# Altium PCB 20K Control Board V1.1.PcbDoc (part 22 of 24)
Units mm, origin at the board's own origin, x right, y up, seen from the top; angles counter-clockwise.
Board outline 132 x 260 mm, 4 copper layers (Top Layer, GND, VCC, Bottom Layer); 1384 components, 779 nets, 4515 pads, 1774 vias.
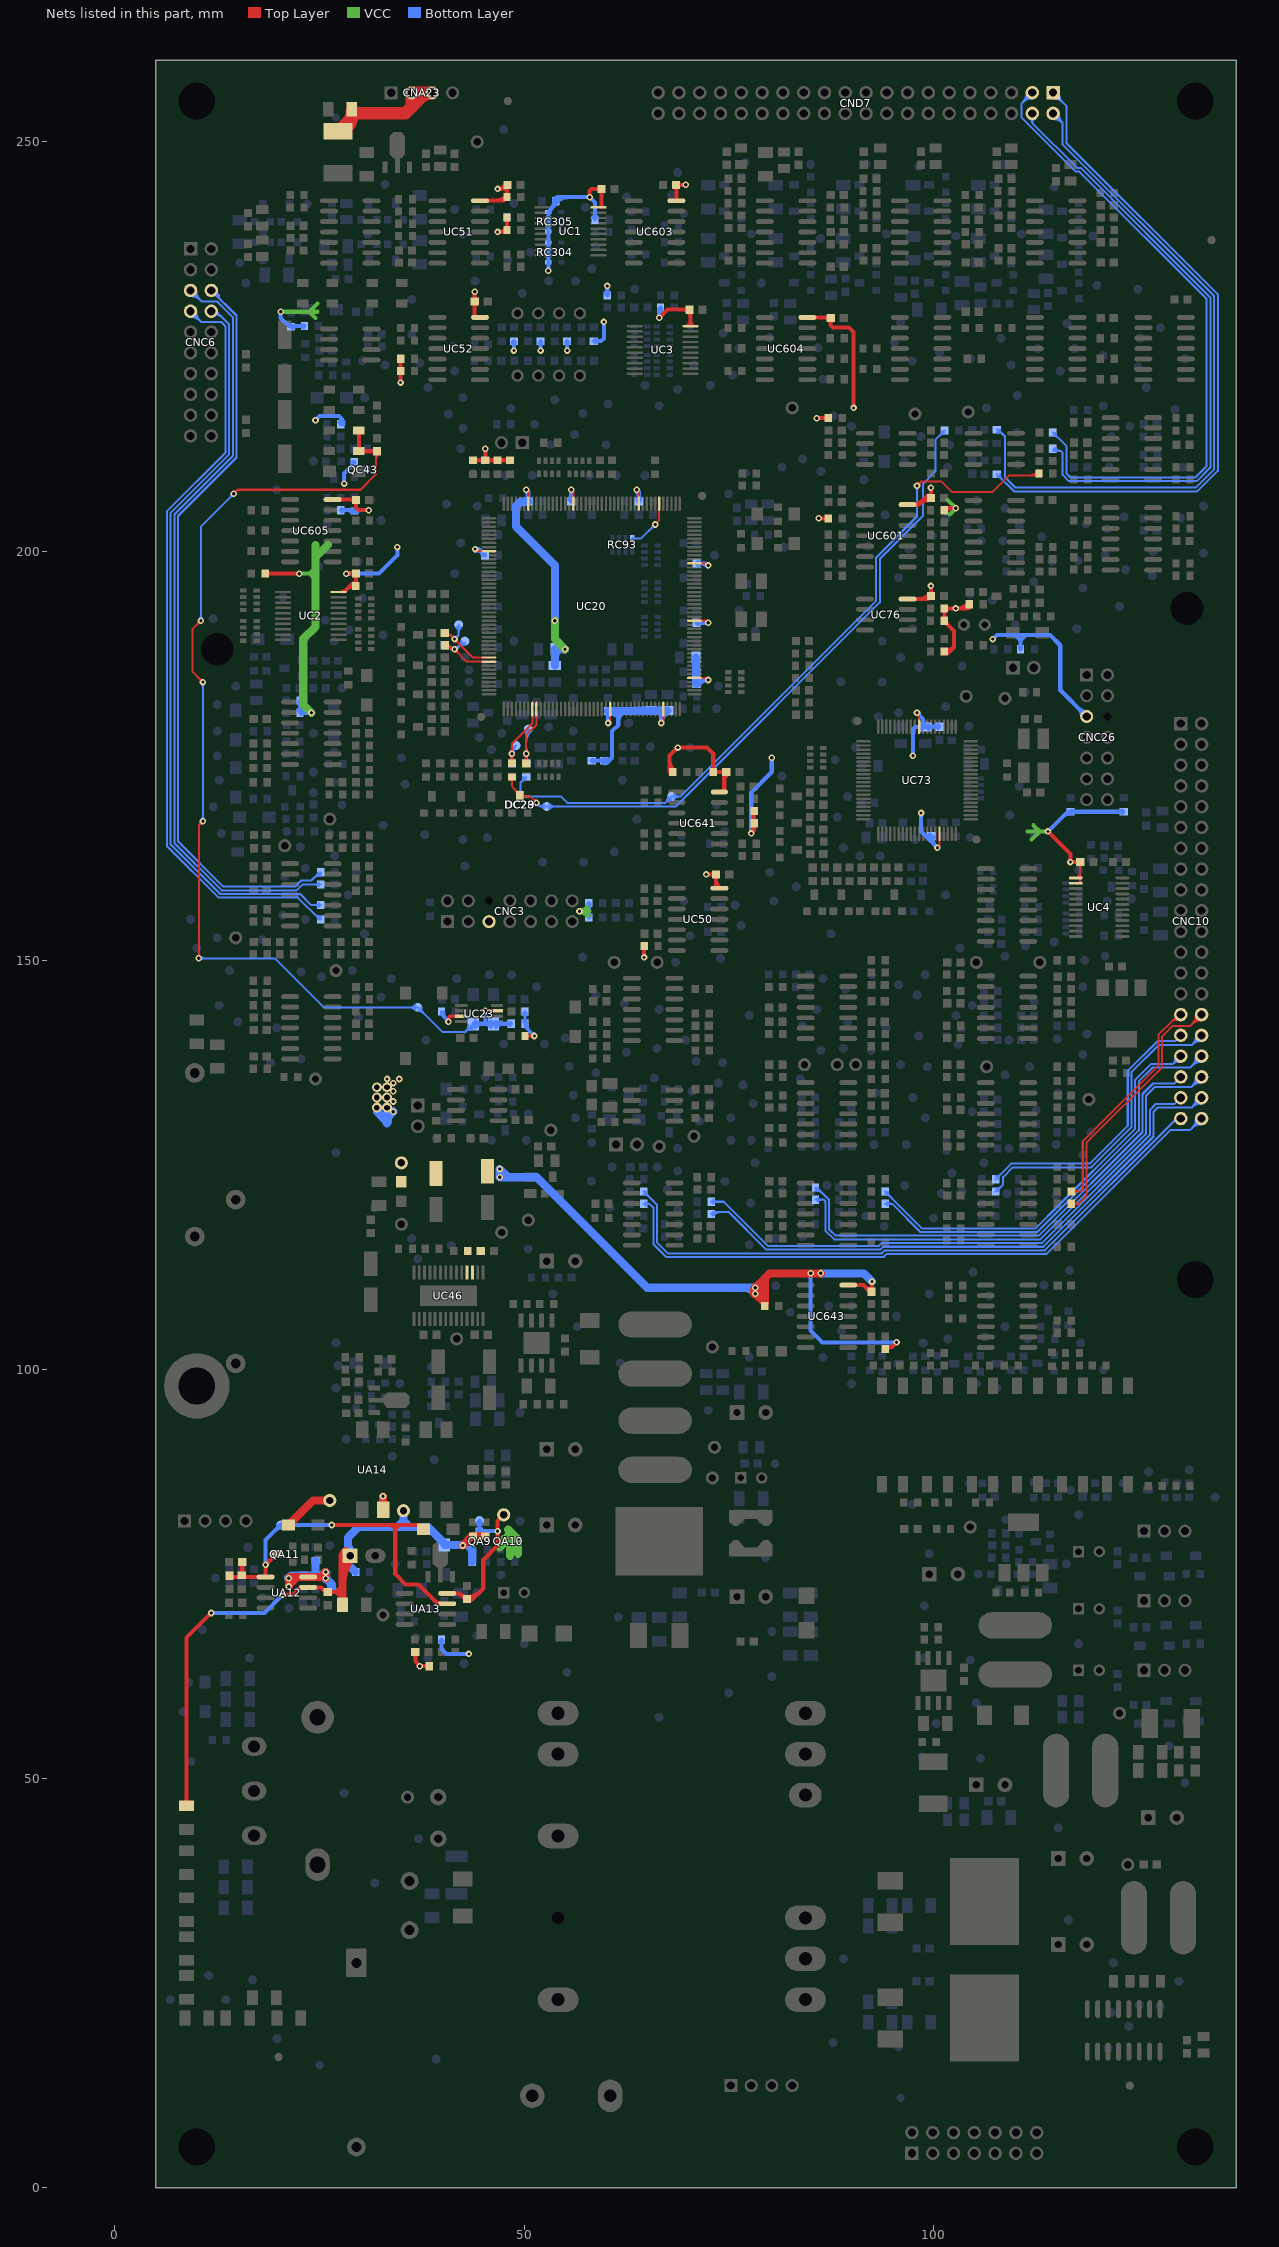
[diagram p24: the nets of this part, all layers, seen from the top]

## Via types
v1: diameter 0.8, hole 0.4, Top Layer to Bottom Layer, tented both sides, 1354 vias
v2: diameter 1.2, hole 0.7, Top Layer to Bottom Layer, 261 vias
v3: diameter 0.8, hole 0.4, Top Layer to Bottom Layer, 58 vias
v4: diameter 1.2, hole 0.7, Top Layer to Bottom Layer, tented top, 58 vias
v5: diameter 0.8, hole 0.4, Top Layer to Bottom Layer, tented top, 22 vias
v6: diameter 1.2, hole 0.7, Top Layer to Bottom Layer, tented both sides, 13 vias
v7: diameter 1.2, hole 0.7, Top Layer to Bottom Layer, tented bottom, 8 vias

## Nets (pads, with @x,y where several pads share a name; then routed paths per layer and width w, separated by ;. In a path a pad name is that pad's centre, name@x,y a point inside that pad or via, vN(x,y) a via of type N, cw(c..) or ccw(c..) an arc to the next point about the centre after c; other vN are vias at no path point) (continued)
V33D: CC30.2 CC42.1 CC46.1 CC108.2 CC109.2 CC123.1 CC124.1 CC125.1 CC126.1 CC127.1 CC128.1 CC129.1 CC130.1 CC131.1 CC141.2 CC179.1 CC180.1 CC181.1 CC182.1 CC186.1 CC187.1 CC221.1 CC293.1 CC296.1 CC297.2 CC308.2 CC405.1 CC420.1 CC424.2 CC425.1 CC442.1 CC445.2 CNC3.5 CNC26.5 EC4.1 EC5.1 LC2.1 LDM2.1 pad.ICT@33.25,130.25 QC43.2 RC110.1 RC212.2 RC214.2 RC215.2 RC216.2 RC226.1 RC232.1 RC268.1 RC269.2 RC270.2 RC271.1 RC272.1 RC276.2 RC277.2 RC278.2 RC279.2 RC284.1 RC287.2 RC289.1 RC290.2 RC292.2 RC296.2 RC298.2 RC304.5 RC304.6 RC304.7 RC304.8 RC305.5 RC305.6 RC305.7 RC305.8 RC316.2 RC317.2 RC337.2 RC340.2 RC382.1 RC449.1 RC450.1 RC455.1 RC490.2 RC493.2 RC494.1 RC500.1 RC520.2 RC521.2 RC522.2 RC523.2 RC524.2 RC525.2 RC532.1 RC622.1 RC635.2 RC636.2 RC647.1 RC648.1 RC654.1 RC658.1 RC660.1 RC698.2 RC699.1 RC700.2 TP59.1 UC1.20 UC2.20 UC3.20 UC4.1 UC4.2 UC20.9 UC20.71 UC20.84 UC20.93 UC20.107 UC20.121 UC20.143 UC20.159 UC20.170 UC23.3 UC46.17 UC46.18 UC50.14 UC51.14 UC52.14 UC73.36 UC73.70 UC76.8 UC601.14 UC603.14 UC604.14 UC605.14 UC641.14 UC643.14 | length 621.4
  Top Layer w0.25: v1(44,200.25) 44.25,200 UC20.9@45.7,200 ; v1(50.25,207.5) 50.5,207.25 UC20.170@50.5,205.8 ; v1(55.75,207.5) 56,207.25 UC20.159@56,205.8 ; v1(60.25,179) 60.5,179.25 UC20.71@60.5,180.7 ; v1(63.75,207.5) 64,207.25 UC20.143@64,205.8 ; v1(66.75,179) 67,179.25 UC20.84@67,180.7 ; UC3.20@69.8,227.5 70.3,228 ; 70.329,227.92 70.25,228 70.3,228 ; UC3.20@70.75,227.55 70.3,228 ; UC20.93@70.8,184.5 72.25,184.5 v1(72.5,184.25) ; UC20.107@70.8,191.5 72.25,191.5 v1(72.5,191.25) ; UC20.121@70.8,198.5 72.25,198.5 v1(72.5,198.25) ; v1(98,180.25) 98.25,180 UC73.70@98.25,178.55 ; v1(100.5,163.75) 100.75,164 UC73.36@100.75,165.45 ; UC4.2@117.4,159.425 117.925,159.425 117.925,160.5 ; UC4.1@117.5,160.075 117.925,160.5 ; CC221.1@117.685,161.735 cw(c117.105,161.155) 117.925,161.155 ; UC4.2@117.925,159.592 cw(c118.558,159.592) UC4.1@118.11,160.04 ; UC4.1@117.925,159.908 ccw(c118.558,159.908) UC4.2@118.11,159.46 ; UC4.1@117.925,159.954 ccw(c117.954,159.954) UC4.1@117.934,159.934 ; UC4.1@117.925,160.196 cw(c117.954,160.196) UC4.1@117.934,160.216 ; 117.925,160.558 ccw(c118.558,160.558) UC4.1@118.11,160.11 ; 117.925,161.034 cw(c118.916,161.034) CC221.1@118.215,161.735 ; CC221.1@117.95,162 117.925,161.975 117.925,160.5
  Top Layer w0.4: v1@40.609,142.641 ccw(c40.267,142.983) 40.75,142.983 ccw(c41.233,142.983) v1@40.891,142.641 ; v1(40.75,142.5) 40.75,143 40.925,143.175 ; v1@40.903,142.629 cw(c41.21,142.89) 40.925,143.175 ; UC23.3@42.323,143.175 40.925,143.175 ; RC284.1@49.85,140.75 v1(51.25,140.75) ; RC284.1@50.277,140.573 cw(c50.704,140.146) 50.704,140.75 cw(c50.704,141.354) RC284.1@50.277,140.927 ; v1@51.109,140.609 ccw(c50.767,140.267) 50.767,140.75 ccw(c50.767,141.233) v1@51.109,140.891
  Top Layer w0.5: RC296.2@18.35,197.25 v1(22.5,197.25) ; RC296.2@18.491,197.109 cw(c18.833,196.767) 18.833,197.25 cw(c18.833,197.733) RC296.2@18.491,197.391 ; UC605.14@26.6,206.31 29.39,206.31 CC180.1@29.45,206.25 29.45,205.3 29.75,205 v1(31,205) ; UC2.20@27.8,195.05 28.05,195.05 28.75,195.75 RC298.2@29.4,195.75 ; v1(28.25,197.25) CC181.1@29.45,197.25 RC298.2@29.45,195.95 ; 28.425,195.425 cw(c28.97,194.88) RC298.2@29.311,195.571 ; 28.702,206.31 cw(c28.702,205.502) 29.273,206.073 cw(c28.846,205.646) 29.45,205.646 cw(c30.054,205.646) CC180.1@29.627,206.073 ; 28.717,195.717 cw(c29.4,195.034) RC298.2@29.4,196 ; 28.918,195.918 cw(c29.296,195.54) RC298.2@29.533,196.019 ; RC298.2@29.259,195.609 ccw(c28.917,195.267) 28.917,195.75 ccw(c28.917,196.233) RC298.2@29.259,195.891 ; RC298.2@29.259,195.941 ccw(c28.796,196.404) 29.45,196.404 ; CC181.1@29.273,197.427 cw(c28.846,197.854) 28.846,197.25 cw(c28.846,196.646) 29.273,197.073 cw(c28.846,196.646) 29.45,196.646 cw(c30.054,196.646) CC181.1@29.627,197.073 ; RC520.2@34.759,221.809 cw(c34.417,221.467) 34.9,221.467 cw(c35.383,221.467) RC520.2@35.041,221.809 ; RC520.2@34.759,222.191 ccw(c34.417,222.533) 34.9,222.533 ccw(c35.383,222.533) RC520.2@35.041,222.191 ; RC521.2@34.759,223.309 cw(c34.417,222.967) 34.9,222.967 cw(c35.383,222.967) RC521.2@35.041,223.309 ; v1(34.9,220.6) RC520.2@34.9,222 RC521.2@34.9,223.5 ; RC216.2@43.75,211.1 RC215.2@45.25,211.1 ; UC52.14@43.765,228.595 ccw(c43.317,229.043) 43.95,229.043 ; CC42.1@43.773,230.323 cw(c43.346,229.896) 43.95,229.896 cw(c44.554,229.896) CC42.1@44.127,230.323 ; CC42.1@43.773,230.677 ccw(c43.346,231.104) 43.95,231.104 ccw(c44.554,231.104) CC42.1@44.127,230.677 ; RC216.2@43.941,210.959 cw(c44.283,210.617) 44.283,211.1 cw(c44.283,211.583) RC216.2@43.941,211.241 ; v1(43.95,231.7) CC42.1@43.95,230.5 43.95,228.55 UC52.14@43.96,228.56 ; UC51.14@44.6,242.81 44.615,242.825 47.475,242.825 RC525.2@47.9,243.25 CC30.2@47.9,244.7 ; RC215.2@45.059,210.959 ccw(c44.717,210.617) 44.717,211.1 ccw(c44.717,211.583) RC215.2@45.059,211.241 ; RC215.2@45.109,211.241 ccw(c44.767,211.583) 45.25,211.583 ccw(c45.733,211.583) RC215.2@45.391,211.241 ; v1(45.25,212.5) RC215.2@45.25,211.1 ; RC215.2@45.441,210.959 cw(c45.783,210.617) 45.783,211.1 cw(c45.783,211.583) RC215.2@45.441,211.241 ; 46.512,242.825 ccw(c46.512,244.588) RC525.2@47.759,243.341 ; RC214.2@46.559,210.959 ccw(c46.217,210.617) 46.217,211.1 ccw(c46.217,211.583) RC214.2@46.559,211.241 ; v1(46.75,239) RC522.2@47.9,239 ; v1@46.934,239 ccw(c46.934,240.166) RC522.2@47.759,239.341 ; RC214.2@46.941,210.959 cw(c47.283,210.617) 47.283,211.1 cw(c47.283,211.583) RC214.2@46.941,211.241 ; 47.55,244.25 ccw(c47.55,244.945) CC30.2@48.175,244.64 ; 47.7,244.25 v1(46.75,244.25) ccw(c46.75,245.335) CC30.2@47.725,244.86 ; CC30.2@47.7,244.5 CC30.2@47.9,244.7 ; RC522.2@47.759,239.441 ccw(c47.417,239.783) 47.9,239.783 ccw(c48.383,239.783) RC522.2@48.041,239.441 ; RC524.2@47.759,240.559 cw(c47.417,240.217) 47.9,240.217 cw(c48.383,240.217) RC524.2@48.041,240.559 ; RC525.2@47.759,243.441 ccw(c47.417,243.783) 47.9,243.783 ccw(c48.383,243.783) RC525.2@48.041,243.441 ; RC522.2@47.9,239.25 RC524.2@47.9,240.75 ; 47.9,244.026 cw(c48.674,244.026) CC30.2@48.127,244.573 ; CC30.2@47.95,244.75 CC30.2@47.9,244.7 ; RC212.2@48.059,210.959 ccw(c47.717,210.617) 47.717,211.1 ccw(c47.717,211.583) RC212.2@48.059,211.241 ; RC212.2@48.25,211.1 RC214.2@46.75,211.1 RC215.2@45.25,211.1 ; v1(58,243.25) 58,244 58.25,244.25 CC179.1@59.45,244.25 UC1.20@59.45,242.05 ; CC179.1@59.273,244.427 cw(c58.846,244.854) 58.846,244.25 cw(c58.846,243.646) 59.273,244.073 cw(c58.846,243.646) 59.45,243.646 cw(c60.054,243.646) CC179.1@59.627,244.073 ; RC532.1@64.509,151.559 cw(c64.167,151.217) 64.65,151.217 cw(c65.133,151.217) RC532.1@64.791,151.559 ; v1(64.65,150.35) RC532.1@64.65,151.5 ; v1(66.5,228.5) 67.5,229.5 CC186.1@70.2,229.5 ; RC272.1@67.75,173.291 ccw(c68.391,173.291) RC272.1@67.938,172.838 ; 67.75,174.499 ccw(c69.599,174.499) RC272.1@68.291,173.191 ; RC272.1@68.15,173 67.75,173.4 67.75,175 v1(68.75,176) 72.35,176 73.1,175.25 RC268.1@73.1,173 74.2,173 74.45,172.75 74.45,170.7 74.31,170.56 UC641.14@73.85,170.56 ; CC182.1@68.373,244.573 cw(c67.826,244.026) 68.6,244.026 ; CC182.1@68.55,244.75 v1(69.75,244.75) ; UC603.14@68.6,242.81 CC182.1@68.6,244.7 ; CC182.1@68.727,244.573 cw(c69.154,244.146) 69.154,244.75 cw(c69.154,245.354) CC182.1@68.727,244.927 ; CC186.1@70.023,229.677 cw(c69.596,230.104) 69.596,229.5 cw(c69.596,228.896) 70.023,229.323 cw(c69.355,228.655) 70.3,228.655 ; UC3.20@70.3,227.583 70.3,228 CC186.1@70.3,229.5 ; v1(72.25,160.5) CC46.1@73.45,160.5 UC50.14@73.45,158.8 ; RC268.1@72.959,173.191 ccw(c72.617,173.533) 73.1,173.533 ccw(c73.583,173.533) RC268.1@73.241,173.191 ; RC268.1@73.241,172.859 cw(c73.583,172.517) 73.583,173 cw(c73.583,173.483) RC268.1@73.241,173.141 ; CC46.1@73.273,160.677 cw(c72.846,161.104) 72.846,160.5 cw(c72.846,159.896) 73.273,160.323 cw(c72.846,159.896) 73.45,159.896 ; CC46.1@73.627,160.323 ccw(c74.054,159.896) 73.45,159.896 ; UC50.14@73.885,158.845 cw(c74.936,159.896) 73.45,159.896 ; 74.45,171.043 ccw(c75.083,171.043) UC641.14@74.635,170.595 ; 74.45,171.793 cw(c75.907,171.793) CC420.1@74.877,172.823 ; CC420.1@74.523,172.823 ccw(c74.096,172.396) 74.096,173 ccw(c74.096,173.604) CC420.1@74.523,173.177 ; v1@77.644,165.606 ccw(c76.543,166.707) RC654.1@78.1,166.707 ; v1(77.75,165.5) 78.1,165.85 RC658.1@78.1,168.25 ; RC654.1@77.959,166.559 cw(c77.617,166.217) 78.1,166.217 cw(c78.583,166.217) RC654.1@78.241,166.559 ; RC654.1@77.959,166.941 ccw(c77.617,167.283) 78.1,167.283 ccw(c78.583,167.283) RC654.1@78.241,166.941 ; RC658.1@77.959,168.059 cw(c77.617,167.717) 78.1,167.717 cw(c78.583,167.717) RC658.1@78.241,168.059 ; RC382.1@79.259,107.941 ccw(c78.917,108.283) 79.4,108.283 ccw(c79.883,108.283) RC382.1@79.541,107.941 ; RC382.1@79.4,107.75 79.4,109.25 ; UC604.14@84.6,228.56 CC187.1@87.39,228.56 ; v1(85.75,216.25) RC110.1@87.15,216.25 ; v1(86,204) RC232.1@87.15,204 ; 86.702,228.56 cw(c86.702,227.752) 87.273,228.323 cw(c86.846,227.896) 87.45,227.896 cw(c88.054,227.896) CC187.1@87.627,228.323 ; RC232.1@87.009,203.859 ccw(c86.667,203.517) 86.667,204 ccw(c86.667,204.483) RC232.1@87.009,204.141 ; RC110.1@87.009,216.109 ccw(c86.667,215.767) 86.667,216.25 ccw(c86.667,216.733) RC110.1@87.009,216.391 ; CC187.1@87.45,228.5 87.45,227.6 87.75,227.3 89.7,227.3 90.25,226.75 v1(90.25,217.5) ; UC643.14@90.69,110.31 UC643.14@89.6,110.31 ; 90.89,110.31 UC643.14@89.6,110.31 ; 91.682,110.068 ccw(c92.45,110.836) CC405.1@92.45,109.75 ; CC405.1@92.273,109.677 ccw(c91.726,110.224) 92.5,110.224 ; v1(92.5,110.75) 92.5,109.55 92.2,109.55 91.44,110.31 UC643.14@89.6,110.31 ; RC635.2@94.1,102.75 94.925,102.75 ; RC635.2@94.257,102.426 cw(c94.925,101.899) 94.925,102.75 ; v1(95.5,103.325) 94.925,102.75 ; UC76.8@96.85,194.155 96.855,194.15 99.35,194.15 CC442.1@99.7,194.5 v1(99.7,195.75) ; UC601.14@96.85,205.685 98.185,205.685 99,206.5 CC141.2@99.7,206.5 v1(99.7,207.75) ; UC601.14@97.65,205.735 ccw(c97.65,207.147) 98.649,206.149 ; 98.078,205.578 cw(c99.7,203.957) CC141.2@99.7,206.25 ; 98.251,194.15 ccw(c98.251,195.949) 99.523,194.677 ccw(c99.096,195.104) 99.7,195.104 ccw(c100.304,195.104) CC442.1@99.877,194.677 ; 98.65,206.15 cw(c99.202,205.598) CC141.2@99.579,206.281 ; 98.932,206.432 cw(c99.7,205.664) CC141.2@99.7,206.75 ; 99.12,206.62 cw(c99.536,206.204) CC141.2@99.821,206.719 ; CC141.2@99.523,206.323 ccw(c99.096,205.896) 99.096,206.5 ccw(c99.096,207.104) 99.523,206.677 ccw(c99.096,207.104) 99.7,207.104 ccw(c100.304,207.104) CC141.2@99.877,206.677 ; RC699.1@101.209,191.691 ccw(c100.867,192.033) 101.35,192.033 ccw(c101.833,192.033) RC699.1@101.491,191.691 ; RC698.2@101.209,192.809 cw(c100.867,192.467) 101.35,192.467 cw(c101.833,192.467) RC698.2@101.491,192.809 ; RC700.2@101.257,187.515 ccw(c101.461,188.138) 101.924,187.674 ; RC700.2@101.35,187.75 102,187.75 102.5,188.25 ; RC226.1@101.35,205 101.6,205.25 v1(102.75,205.25) ; RC700.2@101.412,187.99 ccw(c101.745,189.005) 102.5,188.25 ; RC700.2@101.491,187.609 cw(c101.833,187.267) 101.833,187.75 cw(c101.833,188.233) RC700.2@101.491,187.891 ; RC698.2@101.491,192.859 cw(c101.833,192.517) 101.833,193 cw(c101.833,193.483) RC698.2@101.491,193.141 ; RC226.1@101.491,204.909 cw(c102.316,204.084) 102.316,205.25 ; RC699.1@101.55,191.45 ccw(c102.154,191.45) RC699.1@101.727,191.023 ; v1@102.831,193 ccw(c102.831,195.019) RC455.1@104.259,193.591 ; RC455.1@103.973,193.073 cw(c104.4,192.646) RC455.1@104.4,193.25 ; 104.038,193 ccw(c104.038,193.812) RC455.1@104.612,193.238 ; RC455.1@104.4,193.5 103.9,193 RC698.2@101.35,193 RC699.1@101.35,191.5 101.35,191.4 102.5,190.25 102.5,188.25 ; v1(114,165.75) 116.75,163 v1(116.75,162) CC221.1@117.9,162 ; CC221.1@117.773,161.823 ccw(c117.346,161.396) 117.346,162 ccw(c117.346,162.604) CC221.1@117.773,162.177
  Top Layer w1: v1@78.15,109.25 cw(c79.719,109.25) 78.61,110.36 ; v1@78.15,110 ccw(c79.719,110) 78.61,108.89 ; v1@78.164,109.302 cw(c79.4,108.558) 79.4,110 v1(78.25,110) ; v1@78.164,109.948 ccw(c79.4,110.692) 79.4,109.25 ; v1@78.166,109.195 cw(c78.704,109.546) v1(78.25,110) ; v1(86.25,111.75) 80,111.75 79.4,111.15 ; v1(78.25,109.25) 79.4,108.1 79.4,109.25 ; v1(78.25,109.25) 79.4,109.25 ; v1(78.25,109.25) v1(78.25,110) ; v1(78.25,110) 79.4,111.15 ; 79.4,109.25 79.4,111.15
  VCC w0.5: v1(20.25,229.25) 23.75,229.25 ; v1(22.5,197.25) 23.75,197.25 ; 24.25,197.25 23.75,197.25 ; 24.5,196.5 23.75,197.25 ; 24.5,198 23.75,197.25 ; 24.5,228.5 23.75,229.25 ; 24.75,229.25 23.75,229.25 ; 24.75,230.25 23.75,229.25 ; v1@56.759,155.85 cw(c56.759,154.302) 57.853,155.397 ; v1@56.773,156.149 ccw(c56.89,157.36) 57.75,156.5 57.25,156 ; v1@56.825,155.865 cw(c57.083,155.342) 57.495,155.755 ; 57.75,155.5 57.25,156 ; 58,156 v1(56.759,156) 57.25,156 ; 101.5,205.25 v1(102.75,205.25) ; 101.75,206.25 v1(102.75,205.25) ; 102,204.5 v1(102.75,205.25) ; 111.5,165.75 113,165.75 ; 112,164.75 113,165.75 ; 112.25,166.5 113,165.75 ; v1(114,165.75) 113,165.75
  VCC w1: v1(24,180.25) 23,181.25 23,189.25 24.5,190.75 24.5,199.25 ; 24.5,200.75 24.5,199.25 ; 26,200.75 24.5,199.25 ; v1(53.75,191.5) 53.75,189.25 v1(55,188)
  Bottom Layer w0.4: RC270.2@39.9,143.75 39.9,143.375 v1@40.75,142.525 ; RC270.2@40.15,143.7 ccw(c41.538,143.7) v1@40.557,142.718 ; 40.391,142.884 cw(c40.007,142.5) v1@40.55,142.5 ; 40.451,142.824 ccw(c40.75,143.122) v1@40.75,142.7 ; RC271.1@49.923,142.477 ccw(c49.496,142.904) 50.1,142.904 ccw(c50.704,142.904) RC271.1@50.277,142.477 ; RC269.2@49.923,143.523 cw(c49.496,143.096) 50.1,143.096 cw(c50.704,143.096) RC269.2@50.277,143.523 ; RC269.2@50.1,143.75 50.1,141.9 v1(51.25,140.75) ; RC271.1@50.35,142.2 ccw(c51.678,142.2) 50.739,141.261 ; v1@51.05,140.75 ccw(c50.567,140.75) 50.909,141.091 ccw(c51.25,141.433) v1@51.25,140.95
  Bottom Layer w0.5: v1(20.25,229.25) 20.25,228.5 21.25,227.5 RC340.2@23.15,227.5 ; 20.938,227.812 ccw(c21.45,228.324) RC337.2@21.45,227.6 ; RC337.2@21.691,227.259 cw(c22.274,226.676) 22.274,227.5 ; RC449.1@22.459,180.441 ccw(c22.117,180.783) 22.6,180.783 ccw(c23.083,180.783) RC449.1@22.741,180.441 ; RC450.1@22.459,181.559 cw(c22.117,181.217) 22.6,181.217 cw(c23.083,181.217) RC450.1@22.741,181.559 ; RC450.1@22.6,181.75 RC449.1@22.6,180.25 v1(24,180.25) ; RC449.1@22.741,180.109 cw(c23.083,179.767) 23.083,180.25 cw(c23.083,180.733) RC449.1@22.741,180.391 ; RC340.2@23.009,227.359 ccw(c22.667,227.017) 22.667,227.5 ccw(c22.667,227.983) RC340.2@23.009,227.641 ; v1(24.5,216) 25,216.5 27.35,216.5 27.6,216.25 RC490.2@27.6,215.5 ; RC490.2@27.459,215.691 ccw(c27.117,216.033) 27.6,216.033 ccw(c28.083,216.033) RC490.2@27.741,215.691 ; RC493.2@27.6,205 RC494.1@29.15,205 ; 27.683,216.167 cw(c27.145,215.628) RC490.2@27.896,215.499 ; RC493.2@27.741,204.859 cw(c28.083,204.517) 28.083,205 cw(c28.083,205.483) RC493.2@27.741,205.141 ; v1(28,208.25) 28,209.5 29.25,210.75 QC43.2@29.25,210.905 ; v1(28.25,197.25) 32.25,197.25 34.5,199.5 v1(34.5,200.5) ; 28.476,205 cw(c28.476,204.176) RC494.1@29.059,204.759 ; 28.787,210.287 ccw(c28.168,210.905) QC43.2@29.043,210.905 ; RC494.1@29.25,204.9 29.35,205 v1(31,205) ; RC494.1@29.441,204.759 cw(c30.024,204.176) 30.024,205 ; v1@44,200.1 cw(c44,198.651) CC124.1@45.024,199.676 ; v1(44,200.25) 44.45,200.25 CC124.1@45.2,199.5 ; v1@44.07,200.117 cw(c44.31,199.66) 44.675,200.025 ; CC124.1@44.95,199.5 ccw(c44.346,199.5) 44.773,199.927 ccw(c45.2,200.354) CC124.1@45.2,199.75 ; v1(46.75,239) 47.5,239 47.9,239.4 RC523.2@47.9,240.75 ; RC523.2@47.759,240.559 cw(c47.417,240.217) 47.9,240.217 cw(c48.383,240.217) RC523.2@48.041,240.559 ; RC279.2@48.609,225.509 cw(c48.267,225.167) 48.75,225.167 cw(c49.233,225.167) RC279.2@48.891,225.509 ; v1(48.75,224.5) RC279.2@48.75,225.65 ; v1@50.144,207.394 cw(c49.284,206.534) CC131.1@50.5,206.534 ; v1(50.25,207.5) 50.5,207.25 CC131.1@50.5,206.05 ; CC131.1@50.323,206.227 ccw(c49.896,206.654) 50.5,206.654 ccw(c51.104,206.654) CC131.1@50.677,206.227 ; RC278.2@51.859,225.509 cw(c51.517,225.167) 52,225.167 cw(c52.483,225.167) RC278.2@52.141,225.509 ; v1(52,224.5) RC278.2@52,225.65 ; v1(52.95,234.25) RC304.5@52.95,235.3 RC304.6@52.95,236.1 RC304.7@52.95,236.9 RC304.8@52.95,237.7 RC305.5@52.95,239.05 RC305.6@52.95,239.85 RC305.7@52.95,240.65 RC305.8@52.95,241.45 53.85,242.35 RC290.2@53.85,242.75 54.35,243.25 v1(58,243.25) 58.65,242.6 RC292.2@58.65,240.5 ; RC305.8@53.1,241.45 cw(c53.462,241.45) 53.206,241.706 ; 53.261,241.761 ccw(c52.322,242.7) RC290.2@53.65,242.7 ; RC290.2@53.638,243.012 cw(c54.212,242.438) 54.212,243.25 ; RC290.2@53.991,242.659 cw(c55.419,241.231) 55.419,243.25 ; RC277.2@55.109,225.509 cw(c54.767,225.167) 55.25,225.167 cw(c55.733,225.167) RC277.2@55.391,225.509 ; v1(55.25,224.5) RC277.2@55.25,225.65 ; CC130.1@55.573,206.227 ccw(c55.146,206.654) 55.75,206.654 ccw(c56.354,206.654) CC130.1@55.927,206.227 ; CC130.1@55.75,206.05 v1(55.75,207.5) ; v1(56.759,156) 57.65,156 ; RC287.2@57.759,155.441 ccw(c57.417,155.783) 57.9,155.783 ccw(c58.383,155.783) RC287.2@58.041,155.441 ; RC289.1@57.759,156.809 cw(c57.417,156.467) 57.9,156.467 cw(c58.383,156.467) RC289.1@58.041,156.809 ; RC287.2@57.9,155.25 RC289.1@57.9,157 ; RC660.1@58.25,174.4 RC622.1@59.75,174.4 60.4,174.4 60.75,174.75 ; RC660.1@58.441,174.259 cw(c58.783,173.917) 58.783,174.4 cw(c58.783,174.883) RC660.1@58.441,174.541 ; RC276.2@58.5,225.65 59.4,225.65 59.75,226 v1(59.75,228) ; RC292.2@58.509,240.691 ccw(c58.167,241.033) 58.65,241.033 ccw(c59.133,241.033) RC292.2@58.791,240.691 ; RC276.2@58.691,225.509 cw(c59.033,225.167) 59.033,225.65 cw(c59.033,226.133) RC276.2@58.691,225.791 ; RC622.1@59.559,174.259 ccw(c59.217,173.917) 59.217,174.4 ccw(c59.217,174.883) RC622.1@59.559,174.541 ; RC622.1@59.681,174.125 ccw(c59.878,174.581) RC622.1@60.229,174.229 ; RC622.1@59.879,174.584 ccw(c60.192,175.308) 60.75,174.75 ; RC622.1@59.941,174.259 cw(c60.283,173.917) 60.283,174.4 cw(c60.283,174.883) RC622.1@59.941,174.541 ; RC316.2@60.009,231.441 ccw(c59.667,231.783) 60.15,231.783 ccw(c60.633,231.783) RC316.2@60.291,231.441 ; CC125.1@60.073,180.273 cw(c59.646,179.846) 60.25,179.846 cw(c60.854,179.846) CC125.1@60.427,180.273 ; RC316.2@60.15,231.25 v1(60.15,232.4) ; v1(60.25,179) CC125.1@60.25,180.45 ; CC125.1@60.25,180.2 cw(c60.25,178.27) 61.615,179.635 ; CC125.1@60.25,180.7 cw(c60.25,179.977) 60.761,180.488 ; 60.8,180.45 61.5,179.75 ; 61.5,180.45 61.5,179.75 ; 62.2,180.45 61.5,179.75 ; v1@63.644,207.394 cw(c62.784,206.534) CC129.1@64,206.534 ; v1(63.75,207.5) 64,207.25 CC129.1@64,206.05 ; CC129.1@63.823,206.227 ccw(c63.396,206.654) 64,206.654 ccw(c64.604,206.654) CC129.1@64.177,206.227 ; v1(66.5,228.5) 66.5,229.6 RC317.2@66.65,229.75 ; v1@66.5,228.855 cw(c67.495,228.855) RC317.2@66.791,229.559 ; v1@66.75,178.902 cw(c68.376,178.902) CC297.2@67.468,180.251 ; v1(66.75,179) 66.75,180.5 ; 66.75,179.842 cw(c67.743,179.842) CC297.2@67.188,180.666 ; CC296.1@70.846,183.894 cw(c71.533,183.408) CC296.1@71.533,184.25 ; CC127.1@71.05,191.25 v1(72.5,191.25) ; CC128.1@71.05,198.5 72.25,198.5 v1(72.5,198.25) ; CC127.1@71.227,191.073 cw(c71.654,190.646) 71.654,191.25 cw(c71.654,191.854) CC127.1@71.227,191.427 ; CC128.1@71.227,198.323 cw(c71.654,197.896) 71.654,198.5 cw(c71.654,199.104) CC128.1@71.227,198.677 ; CC296.1@71.25,184.25 v1(72.5,184.25) ccw(c72.5,182.723) CC296.1@71.254,183.606 ; CC128.1@71.534,198.5 cw(c71.534,197.284) v1@72.394,198.144 ; v1(77.75,165.5) 77.75,170.5 80.25,173 v1(80.25,174.75) ; v1(85,111.75) 85,104.75 86.425,103.325 v1(95.5,103.325) ; v1(97.5,175) 97.5,178.25 97.75,178.5 CC445.2@99,178.5 ; v1(98,180.25) 98.75,179.5 98.75,178.75 98.95,178.55 CC424.2@100.75,178.55 ; v1(98.5,168) 98.5,165.75 99.05,165.2 CC425.1@99.75,165.2 99.75,164.5 v1(100.5,163.75) ; CC445.2@98.588,178.288 ccw(c98.076,177.776) 98.076,178.5 ccw(c98.076,179.224) 98.588,178.712 ccw(c98.196,179.104) 98.75,179.104 ; 98.75,179.345 ccw(c99.645,179.345) CC445.2@99.012,178.712 ; 98.85,165.4 ccw(c99.224,165.774) CC425.1@99.581,165.384 ; 99.219,165.031 ccw(c99.577,165.389) CC425.1@99.919,165.016 ; CC445.2@99.412,178.288 cw(c100.045,177.655) 100.045,178.55 ; CC445.2@99.412,178.712 ccw(c99.804,179.104) 99.804,178.55 ; CC425.1@99.524,165.306 ccw(c100.086,165.042) 99.647,164.603 ; CC425.1@99.573,165.377 cw(c99.146,165.804) 99.146,165.2 cw(c99.146,164.596) CC425.1@99.573,165.023 ; CC425.1@99.976,165.094 ccw(c100.77,164.721) 100.15,164.1 ; CC424.2@100.573,178.373 ccw(c100.146,177.946) 100.146,178.55 ccw(c100.146,179.154) CC424.2@100.573,178.727 ; v1(107.25,189.25) 107.75,189.75 110,189.75 ; RC636.2@110.509,188.191 ccw(c110.167,188.533) 110.65,188.533 ccw(c111.133,188.533) RC636.2@110.791,188.191 ; RC636.2@110.65,188 110.65,189.1 ; 110.65,189.65 110.65,189.1 ; 111.3,189.75 110.65,189.1 ; v1(114,165.75) 116.4,168.15 RC647.1@116.75,168.15 RC648.1@123.25,168.15 ; 115.846,167.596 cw(c116.7,166.743) RC647.1@116.7,167.95 ; RC647.1@116.941,168.009 cw(c117.283,167.667) 117.283,168.15 cw(c117.283,168.633) RC647.1@116.941,168.291 ; CNC26.5@118.18,179.79 ccw(c116.852,179.79) 117.791,180.729 ccw(c118.73,181.668) CNC26.5@118.73,180.34 ; CNC26.5@118.73,179.79 115.5,183.02 115.5,188.5 114.25,189.75 110,189.75 ; RC648.1@123.059,168.009 ccw(c122.717,167.667) 122.717,168.15 ccw(c122.717,168.633) RC648.1@123.059,168.291 ; 60.75,174.75 60.75,178 61.5,178.75 61.5,179.75 ; CC425.1@99.573,165.023 cw(c99.146,164.596) 99.75,164.596 ; CC425.1@99.573,165.023 cw(c99.146,164.596) 99.75,164.596 ; 99.75,164.596 cw(c100.354,164.596) 99.927,165.023 ccw(c100.354,164.596) 99.75,164.596 ; 110,189.75 110.65,189.1
  Bottom Layer w1: v2@32,131.5 pad.ICT@33.25,130.25 ; v2@32.1,132 ccw(c33.549,132) 32.524,130.976 ; pad.ICT@33.25,130.042 cw(c35.309,130.042) v3@33.933,131.574 ; pad.ICT@33.25,130.709 cw(c34.156,130.709) v3@33.981,131.598 ; 33.25,131.25 pad.ICT@33.25,130.25 ; pad.ICT@33.3,130.25 cw(c34.628,130.25) 33.689,131.189 ; v3(34,131.5) 33.25,130.75 pad.ICT@33.25,130.25 ; 48,123.5 v1(47,124.5) v1(47,123.5) 51.5,123.5 65,110 v1(78.25,110) v1(78.25,109.25) 77.5,110 ; 49.075,205.575 cw(c50.262,204.388) CC131.1@50.5,206.05 49.55,206.05 49,205.5 49,203 53.75,198.25 v1(53.75,191.5) ; LC2.1@53.75,186.016 CC308.2@53.75,187.75 ; CC308.2@53.75,188 v1(55,188) ; CC125.1@60.25,180.45 61.5,180.45 64.45,180.45 ; CC108.2@63.8,180.5 CC109.2@65.5,180.5 66.75,180.5 CC297.2@67.5,180.5 ; CC296.1@71,183.8 CC123.1@71,187 ; 76.681,110 cw(c76.681,107.681) v1@78.321,109.321 ; v1(86.25,111.75) 91.5,111.75 v1(92.5,110.75)
  other v1: 33.25,135.5 34.75,135.5 102.75,193
  other v2: 32,132 33.25,132 32,133.25 33.25,133.25 32,134.5 33.25,134.5
  other v3: 34,132.75 34,134 34,135
VBUS01: CND7.2 RC118.1 | length 90.4
  Bottom Layer w0.25: RC118.1@107.75,214.85 107.9,214.85 108.75,214 108.75,209.036 110.036,207.75 132.05,207.75 134.3,210 134.3,231.177 115.8,249.677 115.8,252.31 ; RC118.1@107.8,214.525 cw(c107.8,213.499) 108.526,214.224 ; RC118.1@108.125,214.85 ccw(c108.668,214.85) 108.284,214.466 ; CND7.2@114.63,253.48 115.8,252.31 ; CND7.2@114.637,253.03 cw(c114.652,251.998) 115.382,252.728 cw(c116.112,253.458) CND7.2@115.08,253.473 ; CND7.2@114.641,252.78 cw(c114.665,251.175) 115.8,252.31 ; CND7.2@115.33,253.469 ccw(c116.935,253.445) 115.8,252.31
VBUS02: CND7.4 RC145.1 | length 78.3
  Bottom Layer w0.25: CND7.4@111.753,252.867 cw(c111.439,252.296) 112.09,252.296 ; CND7.4@112.09,253.48 112.09,252.296 ; CND7.4@112.427,252.867 ccw(c112.741,252.296) 112.09,252.296 ; RC145.1@114.6,212.25 115.55,212.25 ; RC145.1@114.664,212.49 ccw(c115.098,212.763) 115.098,212.25 ; RC145.1@114.875,212.623 ccw(c115.55,213.047) 115.55,212.25 ; 112.09,252.296 117.564,246.823 118.018,246.823 133.85,230.991 133.85,210.214 132.186,208.55 116.564,208.55 115.8,209.314 115.8,212 115.55,212.25
VBUS+: CND7.1 RC104.1 | length 89
  Bottom Layer w0.25: RC104.1@107.75,209.4 109.85,207.3 132.236,207.3 134.75,209.814 134.75,231.364 116.25,249.864 116.25,254.4 CND7.1@114.63,256.02 ; RC104.1@107.8,209.075 cw(c107.8,208.411) 108.269,208.881 ; RC104.1@108.125,209.4 ccw(c109.03,209.4) 108.39,208.76 ; CND7.1@114.63,255.32 cw(c114.63,253.63) 115.825,254.825 cw(c117.02,256.02) CND7.1@115.33,256.02 ; CND7.1@114.63,255.57 cw(c114.63,254.484) 115.398,255.252 cw(c116.166,256.02) CND7.1@115.08,256.02
VBUS-: CND7.3 RC151.1 | length 85
  Bottom Layer w0.25: CND7.3@111.39,256.02 cw(c109.7,256.02) 110.895,254.825 cw(c112.09,253.63) CND7.3@112.09,255.32 ; CND7.3@111.64,256.02 cw(c110.554,256.02) 111.322,255.252 cw(c112.09,254.484) CND7.3@112.09,255.57 ; CND7.3@112.09,256.02 110.75,254.68 110.75,253 117.377,246.373 117.832,246.373 133.4,230.804 133.4,210.4 132,209 116.75,209 116.25,209.5 116.25,212.85 RC151.1@114.6,214.5 ; RC151.1@114.6,214.125 cw(c114.6,213.22) 115.24,213.86 ; RC151.1@114.925,214.45 ccw(c115.589,214.45) 115.119,213.981
VBUSN: DC29.3 pad.ICT@68,170 RC146.1 RC275.1 | length 100.3
  Top Layer w0.25: v1(98,208) 98.5,208.5 101,208.5 102.25,207.25 107.25,207.25 109.25,209.25 RC146.1@112.9,209.25 ; v1@98,208.275 ccw(c98,208.939) 98.469,208.469 ccw(c98.939,208) v1@98.275,208 ; 111.633,209.25 ccw(c111.633,210.717) RC146.1@112.67,209.68 ; 112.236,209.25 ccw(c112.236,210.114) RC146.1@112.847,209.503
  Bottom Layer w0.25: DC29.3@49.3,170.445 ccw(c48.733,171.012) 49.535,171.012 ccw(c50.337,171.012) DC29.3@49.77,170.445 ; DC29.3@49.535,170.25 49.535,171.685 RC275.1@50.25,172.4 ; 49.61,171.76 ccw(c48.97,172.4) RC275.1@49.875,172.4 ; 49.731,171.881 cw(c50.2,171.411) RC275.1@50.2,172.075 ; DC29.3@49.77,169.797 cw(c50.337,169.23) 50.337,170.032 cw(c50.337,170.834) DC29.3@49.77,170.267 ; 50.035,170.032 54.468,170.032 55.25,169.25 67.25,169.25 pad.ICT@68,170 69.071,170 ; pad.ICT@67.575,170 cw(c66.549,170) 67.274,169.274 cw(c68,168.549) pad.ICT@68,169.575 ; pad.ICT@68.301,169.699 cw(c69.026,168.974) 69.026,170 cw(c69.026,171.026) pad.ICT@68.301,170.301 ; 69.299,170.228 69.071,170 ; v1@97.806,207.806 cw(c97.336,207.336) 98,207.336 cw(c98.664,207.336) v1@98.194,207.806 ; 98,204.75 98,204.225 ; v1(98,208) 98,204.225 ; 69.071,170 93,193.929 93,199 93,199.225 98,204.225
VBUSN.AD: CC168.2 pad.ICT@50.5,178.25 RC275.2 UC20.53 | length 20.7
  Top Layer w0.25: CC168.2@49.985,174.315 ccw(c49.345,174.955) 50.25,174.955 ccw(c51.155,174.955) CC168.2@50.515,174.315 ; v1@50.056,175.056 cw(c49.586,174.586) 50.25,174.586 cw(c50.914,174.586) v1@50.444,175.056 ; v1@50.056,175.444 ccw(c49.586,175.914) 50.25,175.914 ccw(c50.914,175.914) v1@50.444,175.444 ; CC168.2@50.25,174.05 v1(50.25,175.25) 50.25,177.545 51.5,178.795 UC20.53@51.5,180.7
  Bottom Layer w0.25: RC275.2@50.02,174.33 ccw(c49.465,174.885) 50.25,174.885 ccw(c51.035,174.885) RC275.2@50.48,174.33 ; v1@50.056,175.056 cw(c49.586,174.586) 50.25,174.586 cw(c50.914,174.586) v1@50.444,175.056 ; v1@50.056,175.444 ccw(c49.586,175.914) 50.25,175.914 ccw(c50.914,175.914) v1@50.444,175.444 ; RC275.2@50.25,174.1 v1(50.25,175.25) 50.25,178 pad.ICT@50.5,178.25 ; 50.25,176.62 cw(c52.13,176.62) pad.ICT@50.801,177.949 ; 50.25,177.224 cw(c51.526,177.224) pad.ICT@50.624,178.126
VBUSP: DC28.3 pad.ICT@52.75,168.8 RC105.1 RC274.1 | length 91.7
  Top Layer w0.25: RC274.1@48.27,172.17 cw(c47.715,171.615) 48.5,171.615 cw(c49.285,171.615) RC274.1@48.73,172.17 ; RC274.1@48.5,172.4 48.5,171.25 49.239,170.511 DC28.3@49.239,169.805 ; 48.845,170.905 cw(c48.15,170.21) DC28.3@49.133,170.21 ; 49.026,170.724 ccw(c49.465,171.163) DC28.3@49.465,170.542 ; DC28.3@49.465,170.032 50.718,170.032 v1(51.5,169.25) ; DC28.3@49.7,169.797 cw(c50.267,169.23) 50.267,170.032 cw(c50.267,170.834) DC28.3@49.7,170.267 ; v1@51.225,169.25 ccw(c50.561,169.25) 51.031,169.719 ccw(c51.5,170.189) v1@51.5,169.525
  Bottom Layer w0.25: v1(51.5,169.25) 51.95,168.8 ; v1@51.508,168.975 cw(c51.527,168.377) 51.95,168.8 ; v1@51.775,169.242 ccw(c52.373,169.223) 51.95,168.8 ; pad.ICT@52.398,168.562 ccw(c51.95,168.26) 51.95,168.8 ; pad.ICT@52.398,169.038 cw(c51.95,169.34) 51.95,168.8 ; pad.ICT@53.051,168.499 cw(c53.776,167.774) 53.776,168.8 cw(c53.776,169.826) pad.ICT@53.051,169.101 ; 100.76,214.11 cw(c101.4,213.47) RC105.1@101.4,214.375 ; 100.881,214.231 ccw(c100.411,214.7) RC105.1@101.075,214.7 ; RC105.1@101.4,214.75 100.25,213.6 100.25,209.75 98.75,208.25 98.75,204.338 98.55,204.138 93.45,199.038 93.45,193.743 68.507,168.8 51.95,168.8
VBUSP.AD: CC167.2 pad.ICT@49,176.25 RC274.2 UC20.52 | length 18.8
  Top Layer w0.25: RC274.2@48.27,174.33 ccw(c47.715,174.885) 48.5,174.885 ccw(c49.285,174.885) RC274.2@48.73,174.33 ; v1@48.306,175.056 cw(c47.836,174.586) 48.5,174.586 cw(c49.164,174.586) v1@48.694,175.056 ; v1@48.306,175.444 ccw(c47.836,175.914) 48.5,175.914 ccw(c49.164,175.914) v1@48.694,175.444 ; RC274.2@48.5,174.05 RC274.2@48.525,174.075 ; RC274.2@48.5,174.1 48.5,176.116 48.5,176.432 51,178.932 UC20.52@51,180.7
  Bottom Layer w0.25: CC167.2@48.235,174.315 ccw(c47.595,174.955) 48.5,174.955 ccw(c49.405,174.955) CC167.2@48.765,174.315 ; v1@48.284,175.187 cw(c48.737,175.319) 48.403,175.653 ; v1@48.306,175.056 cw(c47.836,174.586) 48.5,174.586 cw(c49.164,174.586) v1@48.694,175.056 ; v1@48.353,175.482 ccw(c48.183,175.75) 48.5,175.75 ; CC167.2@48.5,174.05 v1(48.5,175.25) 48.5,175.75 ; v1@48.524,175.257 cw(c49.199,175.454) pad.ICT@48.702,175.952 ; v1@48.647,175.482 cw(c48.817,175.75) 48.5,175.75 ; v1@48.764,175.327 cw(c49.661,175.589) pad.ICT@49,176.25 48.5,175.75
VCC: CA109.2 pad.ICT@44.535,81.535 QA9.3 UA13.8 VCC.1 | length 29.8
  Top Layer w0.5: UA13.8@40.6,72.655 42.095,72.655 ; CA109.2@43,71.7 ccw(c43,72.786) 43.768,72.018 ; CA109.2@43,71.95 CA109.2@42.8,71.95 ; CA109.2@43.177,71.773 cw(c43.604,71.346) 43.604,71.95 cw(c43.604,72.554) CA109.2@43.177,72.127 ; CA109.2@43.197,71.795 cw(c43.875,71.262) 43.875,72.125 42.625,72.125 42.095,72.655 ; 44.622,72.872 cw(c43,74.493) CA109.2@43,72.2 ; VCC.1@47.5,82.25 46.75,81.5 v1(46.75,80.25) 46.75,78.5 45,76.75 45,73.25 43.7,71.95 CA109.2@42.8,71.95 ; 42.095,72.655 CA109.2@42.8,71.95 ; CA109.2@43,72.2 cw(c43,73.286) 42.232,72.518 ccw(c43,73.286) CA109.2@43,72.2
  Bottom Layer w0.5: pad.ICT@44.323,81.323 cw(c43.811,80.811) 44.535,80.811 cw(c45.259,80.811) pad.ICT@44.747,81.323 ; QA9.3@44.388,80.356 ccw(c44.035,80.71) 44.535,80.71 ccw(c45.035,80.71) QA9.3@44.681,80.356 ; pad.ICT@44.535,81.535 QA9.3@44.535,80.032 44.753,80.25 v1(46.75,80.25) ; QA9.3@44.681,80.063 cw(c45.132,79.613) 45.132,80.25
VCC-AUX: CA85.1 CA86.1 CA87.1 CA87a.1 DA15.2 QA9.2 RA122.1 RA124.1 RA165.1 RA186.2 RA215.2 UA12.7 VCC-AUX.1 | length 101.6
  Top Layer w0.5: RA124.1@8.467,46.983 ccw(c7.784,47.666) 8.75,47.666 ccw(c9.716,47.666) RA124.1@9.033,46.983 ; RA124.1@8.75,46.75 8.75,67.25 v1(11.75,70.25) ; v1(20.5,72.5) 21.75,72.5 22.635,73.385 UA12.7@23.6,73.385 25.165,73.385 CA86.1@26,72.55 ; 22.433,73.183 cw(c22.8,72.816) UA12.7@22.8,73.335 ; 25.29,73.26 ccw(c25.831,73.801) CA86.1@25.958,73.047 ; CA86.1@26,72.8 27,72.8 ; CA86.1@26.177,72.623 cw(c26.604,72.196) 26.604,72.8 cw(c26.604,73.404) CA86.1@26.177,72.977 ; 27.6,72.8 27,72.8 ; 27.617,72.183 cw(c26.934,71.5) CA85.1@27.9,71.5 ; 27.7,73.5 27,72.8 ; CA85.1@27.8,71.25 27.8,72 27,72.8
  Top Layer w1: CA85.1@27.8,71.25 27.8,76.57 CA87.1@28.48,77.25 ; 27.8,74.039 cw(c31.941,74.039) CA87.1@29.013,76.967 ; 27.8,74.522 cw(c31.458,74.522) CA87.1@28.871,77.109 ; 27.8,76.098 cw(c28.752,76.098) CA87.1@28.734,77.05 ; 27.8,76.453 cw(c29.527,76.453) CA87.1@28.306,77.674 ; 27.8,76.936 cw(c29.044,76.936) CA87.1@28.164,77.816 ; CA87a.1@27.962,76.732 cw(c28.73,75.964) CA87.1@28.73,77.05 ; v1(42.5,78.5) 43.65,79.65 RA186.2@43.75,79.65 RA215.2@45.25,79.65
  Bottom Layer w0.5: v1(11.75,70.25) 18.25,70.25 v1(20.5,72.5)
  Bottom Layer w1: 28.48,76.141 cw(c29.35,76.141) CA87.1@28.925,76.901 ; 28.48,76.164 cw(c29.816,76.164) CA87.1@28.871,77.109 ; 28.48,78.336 ccw(c29.816,78.336) CA87.1@28.871,77.391 ; 28.48,78.819 ccw(c30.299,78.819) CA87.1@29.013,77.533 ; RA122.1@29.4,75.25 28.48,76.17 28.48,77.25 28.48,79.48 29.75,80.75 38.25,80.75 40.45,78.55 DA15.2@40.25,78.55 43.045,78.55 QA9.2@43.595,78 ; 34.5,80.75 35.25,81.5 ; 35.25,80.75 35.25,81.5 ; VCC-AUX.1@35.25,82.75 35.25,81.5 ; 36,80.75 35.25,81.5 ; RA165.1@43.65,76.5 QA9.2@43.65,77.945
VCOM: CA105.2 CA111.2 DA17.1 pad.ICT@20.25,81 QA11.3 RA166.1 UA12.1 UA13.7 | length 52.2
  Top Layer w0.5: CA111.2@14.145,74.655 UA12.1@18.4,74.655 v1(18.4,76.147) QA11.3@19.718,77.465 ; RA166.1@15.55,74.9 CA105.2@15.55,76.5 ; v1(26.5,81) 37.2,81 DA17.1@37.7,80.5 ; 33.75,81 34.25,80.5 ; 34.25,81 34.25,80.5 ; 34.75,81 34.25,80.5 ; 39.076,71.735 ccw(c39.8,72.459) UA13.7@39.8,71.435 ; UA13.7@40.6,71.385 39.426,71.385 37.061,73.75 35.5,73.75 34.25,75 34.25,80 34.25,80.5
  Bottom Layer w0.5: v1(18.4,76.147) 18.4,79.15 pad.ICT@20.25,81 ; pad.ICT@19.95,81 cw(c19.226,81) 19.738,80.488 cw(c20.25,79.976) pad.ICT@20.25,80.7 ; pad.ICT@20,81 v1(26.5,81) ; 20.974,81 cw(c20.974,81.724) 20.462,81.212 ccw(c20.974,81.724) 20.974,81 ; 20.974,81 ccw(c20.974,80.276) 20.462,80.788 cw(c20.974,80.276) 20.974,81
VGRIDR+: CNC10.40 RC6.2 | length 85.9
  Bottom Layer w0.25: RC6.2@64.6,120.25 65.3,120.25 ; RC6.2@64.848,120.04 cw(c65.3,119.659) 65.3,120.25 ; RC6.2@64.848,120.46 ccw(c65.3,120.841) 65.3,120.25 ; CNC10.40@132.07,130.67 cw(c130.38,130.67) 131.575,129.475 cw(c132.77,128.28) CNC10.40@132.77,129.97 ; CNC10.40@132.32,130.67 cw(c131.234,130.67) 132.002,129.902 cw(c132.77,129.134) CNC10.40@132.77,130.22 ; CNC10.40@132.77,130.67 131.35,129.25 128.955,129.25 113.805,114.1 94.25,114.1 93.9,113.75 67.364,113.75 65.8,115.314 65.8,119.75 65.3,120.25
VGRIDR-: CNC10.39 RC19.1 | length 79.7
  Bottom Layer w0.25: RC19.1@64.6,121.375 cw(c64.6,120.47) 65.24,121.11 ; RC19.1@64.75,121.75 RC19.1@64.6,121.75 66.25,120.1 66.25,115.5 67.55,114.2 93.714,114.2 94.064,114.55 113.618,114.55 129.738,130.67 CNC10.39@130.23,130.67 ; RC19.1@64.925,121.7 ccw(c65.589,121.7) 65.119,121.231
VGRIDS+: CNC10.36 RC67.2 | length 67.8
  Bottom Layer w0.25: RC67.2@85.6,120.75 86.614,120.75 86.8,120.564 86.8,116.975 87.875,115.9 113.059,115.9 126,128.841 126,133.477 127.023,134.5 131.52,134.5 CNC10.36@132.77,135.75 ; RC67.2@85.83,120.52 cw(c86.385,119.965) 86.385,120.75 cw(c86.385,121.535) RC67.2@85.83,120.98 ; CNC10.36@132.07,135.75 cw(c130.38,135.75) 131.575,134.555 cw(c132.77,133.36) CNC10.36@132.77,135.05 ; CNC10.36@132.32,135.75 cw(c131.234,135.75) 132.002,134.982 cw(c132.77,134.214) CNC10.36@132.77,135.3
VGRIDS-: CNC10.35 RC73.1 | length 61.7
  Bottom Layer w0.25: RC73.1@85.6,121.875 cw(c85.6,120.608) 86.496,121.504 ; RC73.1@85.6,122.125 cw(c85.6,121.461) 86.069,121.931 ; RC73.1@85.6,122.25 85.6,122.16 RC73.1@85.63,122.13 ; RC73.1@85.75,122.25 87.25,120.75 87.25,117.162 88.062,116.35 112.873,116.35 125.55,129.027 125.55,133.664 126.836,134.95 129.43,134.95 CNC10.35@130.23,135.75 ; RC73.1@85.925,122.2 ccw(c86.227,122.2) RC73.1@86.013,121.987
VGRIDT+: CNC10.32 RC116.2 | length 42.9
  Bottom Layer w0.25: RC116.2@107.6,121.75 107.687,121.75 108.513,122.576 108.513,123.513 109.7,124.7 119.314,124.7 124.2,129.586 124.2,130.214 124.2,136.314 127.566,139.68 131.62,139.68 ; RC116.2@107.6,122.125 ccw(c107.6,123.241) 108.389,122.452 ; RC116.2@107.925,121.8 cw(c108.378,121.8) 108.058,122.121 ; CNC10.32@132.07,140.811 cw(c130.532,140.768) 131.62,139.68 ; CNC10.32@132.32,140.818 cw(c131.331,140.79) 132.031,140.091 cw(c132.73,139.391) CNC10.32@132.758,140.38 ; CNC10.32@132.751,140.13 ccw(c132.708,138.592) 131.62,139.68 ; CNC10.32@132.77,140.83 131.62,139.68
VGRIDT-: CNC10.31 RC132.1 | length 35.1
  Bottom Layer w0.25: RC132.1@107.6,123.25 109.5,125.15 119.127,125.15 123.75,129.773 123.75,136.5 127.38,140.13 129.53,140.13 CNC10.31@130.23,140.83 ; RC132.1@107.6,123.625 ccw(c107.6,124.53) 108.24,123.89 ; RC132.1@107.925,123.3 cw(c108.589,123.3) 108.119,123.769
VINVR+: CNC10.38 RC167.1 | length 77.6
  Bottom Layer w0.25: RC167.1@72.85,119 73.1,119.25 75,119.25 79.6,114.65 93.527,114.65 93.877,115 113.432,115 126.9,128.468 126.9,131.514 127.386,132 131.56,132 CNC10.38@132.77,133.21 ; RC167.1@72.903,118.997 cw(c73.514,118.386) 73.514,119.25 ; RC167.1@73.08,118.82 cw(c74.117,117.783) 74.117,119.25 ; CNC10.38@132.07,133.21 cw(c130.38,133.21) 131.575,132.015 cw(c132.77,130.82) CNC10.38@132.77,132.51 ; CNC10.38@132.32,133.21 cw(c131.234,133.21) 132.002,132.442 cw(c132.77,131.674) CNC10.38@132.77,132.76
VINVR-: CNC10.37 RC177.1 | length 70.3
  Bottom Layer w0.25: RC177.1@72.886,120.5 RC177.1@72.85,120.5 74.386,120.5 79.786,115.1 93.341,115.1 93.691,115.45 113.246,115.45 126.45,128.654 126.45,131.7 127.2,132.45 129.47,132.45 CNC10.37@130.23,133.21 CNC10.37@130.074,133.21 ; RC177.1@73.08,120.27 cw(c73.635,119.715) 73.635,120.5 cw(c73.635,121.285) RC177.1@73.08,120.73
VINVS+: CNC10.34 RC180.1 | length 58.1
  Bottom Layer w0.25: RC180.1@94.1,120.25 94.964,120.25 98.414,116.8 112.686,116.8 125.1,129.214 125.1,135.214 126.788,136.902 131.382,136.902 CNC10.34@132.77,138.29 ; RC180.1@94.33,120.02 cw(c94.885,119.465) 94.885,120.25 cw(c94.885,121.035) RC180.1@94.33,120.48 ; CNC10.34@132.07,138.29 cw(c130.38,138.29) 131.575,137.095 cw(c132.77,135.9) CNC10.34@132.77,137.59 ; CNC10.34@132.32,138.29 cw(c131.234,138.29) 132.002,137.522 cw(c132.77,136.754) CNC10.34@132.77,137.84
VINVS-: CNC10.33 RC191.1 | length 56.5
  Bottom Layer w0.25: RC191.1@94.1,121.75 94.925,120.925 ; RC191.1@94.259,121.591 94.925,120.925 ; CNC10.33@129.542,138.161 cw(c128.651,137.993) 129.292,137.352 ; CNC10.33@129.788,138.207 cw(c129.215,138.099) 129.627,137.687 cw(c130.039,137.275) CNC10.33@130.147,137.848 ; CNC10.33@130.101,137.602 ccw(c129.933,136.711) 129.292,137.352 ; CNC10.33@130.23,138.29 129.292,137.352 ; 94.925,120.925 98.6,117.25 112.5,117.25 113.494,118.244 114.5,119.25 124.65,129.4 124.65,135.4 126.602,137.352 129.292,137.352 ; RC191.1@94.1,121.375 cw(c94.1,120.47) 94.74,121.11 ccw(c94.1,120.47) RC191.1@94.1,121.375 ; RC191.1@94.425,121.7 ccw(c95.089,121.7) 94.619,121.231 cw(c95.089,121.7) RC191.1@94.425,121.7
VINVT+: CNC10.30 RC199.1 | length 37.1
  Top Layer w0.25: RC199.1@116.85,120.25 117.75,120.25 118.7,121.2 118.7,127.7 127.95,136.95 127.95,140.7 129.25,142 131.4,142 CNC10.30@132.77,143.37 ; RC199.1@117.08,120.02 cw(c117.635,119.465) 117.635,120.25 cw(c117.635,121.035) RC199.1@117.08,120.48 ; CNC10.30@132.07,143.37 cw(c130.38,143.37) 131.575,142.175 cw(c132.77,140.98) CNC10.30@132.77,142.67 ; CNC10.30@132.32,143.37 cw(c131.234,143.37) 132.002,142.602 cw(c132.77,141.834) CNC10.30@132.77,142.92
VINVT-: CNC10.29 RC202.1 | length 30.2
  Top Layer w0.25: RC202.1@116.85,121.75 118,121.75 118.25,122 118.25,127.886 127.5,137.136 127.5,140.886 129.307,142.693 ; RC202.1@117.08,121.52 cw(c117.635,120.965) 117.635,121.75 cw(c117.635,122.535) RC202.1@117.08,121.98 ; CNC10.29@130.23,142.73 130.193,142.693 129.307,142.693 ; CNC10.29@130.23,143.37 129.984,143.37 129.307,142.693
VPV1+: CNC6.5 RC2.2 | length 99.9
  Bottom Layer w0.25: CNC6.5@9.23,231.15 cw(c9.23,229.46) 10.425,230.655 cw(c11.62,231.85) CNC6.5@9.93,231.85 ; CNC6.5@9.23,231.4 cw(c9.23,230.314) 9.998,231.082 cw(c10.766,231.85) CNC6.5@9.68,231.85 ; CNC6.5@9.23,231.85 10.58,230.5 12.5,230.5 13,230 14.4,228.6 14.4,211.627 7.25,204.477 7.25,164.341 13.041,158.55 22.186,158.55 22.886,159.25 RC2.2@25.15,159.25 ; RC2.2@24.92,159.02 ccw(c24.365,158.465) 24.365,159.25 ccw(c24.365,160.035) RC2.2@24.92,159.48
VPV1-: CNC6.6 RC15.2 | length 95.7
  Bottom Layer w0.25: CNC6.6@12.313,231.307 12.693,231.307 ; 12.693,230.943 12.693,231.307 ; 24.254,160.004 cw(c25.15,159.108) RC15.2@25.15,160.375 ; 24.681,160.431 cw(c25.15,159.961) RC15.2@25.15,160.625 ; RC15.2@24.737,160.487 ccw(c24.523,160.7) RC15.2@24.825,160.7 ; RC15.2@25.15,160.75 25,160.75 24.004,159.754 22.754,159.754 22,159 13.227,159 7.7,164.527 7.7,204.291 14.85,211.441 14.85,228.786 11.786,231.85 CNC6.6@11.77,231.85 12.15,231.85 12.693,231.307
VPV1.AD: CC152.2 pad.ICT@42,191 RC255.2 UC20.35 | length 16.4
  Top Layer w0.25: CC152.2@40.55,189.75 40.975,189.75 ; CC152.2@40.674,190.029 ccw(c40.975,190.052) 40.975,189.75 ; 40.987,189.737 ccw(c41.5,190.25) v1@41.5,189.525 ; 41.048,189.676 cw(c40.622,189.25) v1@41.225,189.25 ; v1@41.5,188.975 cw(c41.5,188.372) 41.926,188.798 ; v1@41.775,189.25 ccw(c42.5,189.25) 41.987,188.737 ; UC20.35@45.7,187 43.725,187 40.975,189.75
  Bottom Layer w0.25: RC255.2@40.35,190 40.6,189.75 41,189.75 ; RC255.2@40.668,190.018 ccw(c41,190.09) 41,189.75 ; v1@41.225,189.25 ccw(c40.561,189.25) 41.031,189.719 ccw(c41.5,190.189) 41.5,189.525 ccw(c41.5,190.189) 41.969,189.719 ccw(c42.439,189.25) v1@41.775,189.25 ; pad.ICT@41.699,190.699 cw(c40.974,189.974) 42,189.974 cw(c43.026,189.974) pad.ICT@42.301,190.699 ; pad.ICT@42,191 42,189.75 v1(41.5,189.25) 41,189.75
VPV2+: CNC6.8 RC32.2 | length 94.6
  Bottom Layer w0.25: CNC6.8@11.77,229.31 CNC6.8@12.19,229.31 ; CNC6.8@11.819,229.116 cw(c12.067,228.126) 12.789,228.848 ; CNC6.8@11.879,228.874 cw(c12.192,227.627) 13.101,228.536 ; CNC6.8@12.326,229.31 13.134,228.502 13.95,227.686 13.95,211.814 6.8,204.664 6.8,164.154 12.854,158.1 22.636,158.1 23.986,156.75 RC32.2@25.15,156.75 RC32.2@25.04,156.75 ; CNC6.8@12.47,229.31 ccw(c12.817,229.31) 12.572,229.065 ; RC32.2@24.92,156.52 ccw(c24.365,155.965) 24.365,156.75 ccw(c24.365,157.535) RC32.2@24.92,156.98
VPV2-: CNC6.7 RC46.2 | length 100.1
  Bottom Layer w0.25: CNC6.7@9.23,228.61 cw(c9.23,226.92) 10.425,228.115 cw(c11.62,229.31) CNC6.7@9.93,229.31 ; CNC6.7@9.23,228.86 cw(c9.23,227.774) 9.998,228.542 cw(c10.766,229.31) CNC6.7@9.68,229.31 ; CNC6.7@9.23,229.31 10.54,228 13,228 13.5,227.5 13.5,212 6.35,204.85 6.35,163.968 12.668,157.65 22.35,157.65 25,155 RC46.2@25.15,155 ; 24.254,155.746 ccw(c25.15,156.642) RC46.2@25.15,155.375 ; 24.681,155.319 ccw(c25.15,155.789) RC46.2@25.15,155.125 ; RC46.2@24.737,155.263 cw(c24.523,155.05) RC46.2@24.825,155.05
VPV2.AD: CC153.2 pad.ICT@42.75,189 RC256.2 UC20.36 | length 18
  Top Layer w0.25: RC256.2@40.35,188.5 RC256.2@40.6,188.25 ; RC256.2@40.415,188.487 ccw(c40.821,188.717) 40.821,188.25 ; RC256.2@40.633,188.61 ccw(c41.25,188.959) 41.25,188.25 RC256.2@40.6,188.25 ; 41.029,188.25 cw(c41.029,187.733) v1@41.478,187.988 ; v1@41.261,187.865 ccw(c40.6,187.491) RC256.2@40.6,188.25 ; v1@41.5,187.725 cw(c41.5,187.061) 41.969,187.531 cw(c42.439,188) v1@41.775,188 ; v1(41.5,188) 43,186.5 UC20.36@45.7,186.5
  Bottom Layer w0.25: CC153.2@40.415,188.549 ccw(c40.87,188.746) 40.87,188.25 ; CC153.2@40.644,188.648 ccw(c41.25,188.909) v1@41.25,188.25 ; 41.002,188.25 cw(c41.002,187.687) v1@41.479,187.987 ; v1@41.267,187.854 ccw(c40.55,187.403) 40.55,188.25 v1@41.25,188.25 ; v1@41.5,188.025 ccw(c41.5,188.689) 41.969,188.219 ; v1@41.5,188.275 ccw(c41.5,189.542) pad.ICT@42.396,188.646 ; pad.ICT@42.325,189 cw(c41.299,189) 42.024,188.274 cw(c42.75,187.549) pad.ICT@42.75,188.575 ; pad.ICT@42.75,188.75 42.5,188.75 41.75,188 v1(41.5,188) v1@41.25,188.25
VR_DRV: CA7.2 CNA23.2 CNA23.3 FA1.1 | length 34.8
  Top Layer w1.5: FA1.1@27.25,251.314 28.95,253.013 ; FA1.1@27.833,251.5 ccw(c25.593,254) CA7.2@28.95,254 ; FA1.1@27.916,251.549 ccw(c27.396,253.013) 28.95,253.013 ; FA1.1@28.25,251.314 cw(c30.64,251.324) 28.95,253.013 ; 28.6,252.663 ccw(c27.513,253.75) CA7.2@29.05,253.75 ; 36.25,254.5 37.75,256 ; 36.957,255.207 cw(c38.75,253.415) 38.75,255.95 ccw(c38.75,254.019) 37.384,255.384 ; 37.25,255.5 cw(c38.416,254.334) CNA23.3@38.74,255.951 ; 28.95,253.013 CA7.2@28.95,254 29.45,253.5 34.5,253.5 35.5,253.5 ; 35.5,253.5 38,256 CNA23.3@38.75,256 37.75,256 ; 35.5,253.5 36.25,254.25 CNA23.2@36.25,256 37.75,256
VREF-5V: CA107.1 CA113.1 DA16.2 pad.ICT@26.5,73.25 QA10.1 RA151.1 RA161.2 RA171.2 RA182.2 UA12.8 UA14.4 Vref-5V.1 | length 67.2
  Top Layer w0.5: CA113.1@36.523,65.323 cw(c36.096,64.896) 36.7,64.896 cw(c37.304,64.896) CA113.1@36.877,65.323 ; CA113.1@36.7,65.5 36.7,64.3 v1(37.25,63.75) RA161.2@38.4,63.75 ; RA161.2@38.259,63.609 ccw(c37.917,63.267) 37.917,63.75 ccw(c37.917,64.233) RA161.2@38.259,63.891
  Top Layer w1: DA16.2@21.2,81 24.2,84 Vref-5V.1@26.25,84 ; v1(21.25,73.5) v1(21.25,74.5) 21.405,74.655 UA12.8@23.6,74.655 v1@25.595,74.655 ; v1@21.25,73.655 22.25,74.655 ; 25.155,74.655 v1(25.75,75.25) v1(25.75,74.5) ; UA14.4@32.75,82.87 v1(32.75,84.5) ; 22.25,74.655 cw(c21.529,75.376) 21.22,74.405 ccw(c21.529,75.376) 22.25,74.655
  VCC w1: 47,78.25 48,79.25 v1(49.25,79.25) ; 47.5,79.25 v1(49.25,79.25) ; 48,79.639 48.389,79.25 v1(49.25,79.25) ; 48.034,80.466 v1(49.25,79.25) ; 48.25,77.25 48.25,78.25 v1(49.25,79.25) ; 48.431,79.208 ccw(c48.891,79.668) v1@49.315,79.174 ; 49.25,77.5 v1(49.25,79.25)
  Bottom Layer w0.5: RA171.2@39.759,66.809 cw(c39.417,66.467) 39.9,66.467 cw(c40.383,66.467) RA171.2@40.041,66.809 ; RA171.2@39.9,67 39.9,65.85 40.5,65.25 v1(43.25,65.25)
  Bottom Layer w1: RA182.2@24.5,76.65 CA107.1@24.5,74.8 ; 25.3,74.8 v1(25.75,75.25) v1(25.75,74.5) ; 25.45,74.8 v1(25.75,74.5) ; v1@25.65,75.25 ccw(c27.219,75.25) 26.11,74.14 ; v1@25.666,74.445 cw(c26.204,74.796) v1(25.75,75.25) cw(c24.647,76.353) CA107.1@24.5,74.8 ; v1@25.7,74.8 CA107.1@24.5,74.8 ; 26.061,74.189 cw(c25.122,73.25) pad.ICT@26.45,73.25 ; pad.ICT@26.5,73.25 26.5,73.75 v1(25.75,74.5) ; QA10.1@49,78 49.25,78.25 v1(49.25,79.25) ; QA10.1@49.03,77.97 ccw(c48.5,78.5) 49.25,78.5 ; 22.25,74.75 cw(c21.385,75.615) 21.238,74.401 ccw(c21.385,75.615) 22.25,74.75 ; 22.25,74.75 21.25,73.75 v1(21.25,73.5) v1(21.25,74.5) 21.55,74.8 22.25,74.8 CA107.1@24.5,74.8 ; v1@21.179,74.571 cw(c21.733,74.017) 21.733,74.8 ccw(c21.733,74.017) v1@21.179,74.571 ; CA107.1@24.905,74.8 ccw(c24.905,76.095) 25.821,75.179 cw(c24.905,76.095) CA107.1@24.905,74.8 ; 25.267,74.8 cw(c25.267,74.017) 25.821,74.571 ccw(c25.267,74.017) 25.267,74.8
X\R\S\: CC287.1 DC25.2 DC26.2 DC41.2 DC42.2 pad.ICT@37,144.25 RC271.2 UC23.7 | length 159.8
  Top Layer w0.25: v1@10.056,150.444 ccw(c9.586,150.914) 10.25,150.914 ccw(c10.914,150.914) v1@10.444,150.444 ; v1@10.225,191.5 cw(c9.561,191.5) 10.031,191.031 cw(c10.5,190.561) v1@10.5,191.225 ; v1(10.25,150.25) 10.25,166.5 v1(10.75,167) ; v1@10.475,167 cw(c9.811,167) 10.281,166.531 cw(c10.75,166.061) v1@10.75,166.725 ; v1@10.475,184 ccw(c9.811,184) 10.281,184.469 ccw(c10.75,184.939) v1@10.75,184.275 ; v1(10.5,191.5) 9.5,190.5 9.5,185.25 v1(10.75,184) ; v1(14.5,207) 15,207.5 30,207.5 31.883,209.383 31.883,211.833 CC287.1@32.25,212.2 ; v1@14.5,207.275 ccw(c14.5,207.939) 14.969,207.469 ccw(c15.439,207) v1@14.775,207 ; CC287.1@31.735,211.935 cw(c31.378,211.578) 31.883,211.578 ; 31.883,211.012 cw(c33.188,211.012) CC287.1@32.265,211.935 ; 31.883,211.615 cw(c32.585,211.615) CC287.1@32.088,212.112
  Top Layer w0.4: v1(45.25,143.825) UC23.7@46.677,143.825 ; v1@45.391,143.684 cw(c45.733,143.342) 45.733,143.825 cw(c45.733,144.308) v1@45.391,143.966
  Top Layer w0.5: DC42.2@29.623,212.427 ccw(c29.196,212.854) 29.8,212.854 ccw(c30.404,212.854) DC42.2@29.977,212.427 ; DC41.2@29.623,214.573 cw(c29.196,214.146) 29.8,214.146 cw(c30.404,214.146) DC41.2@29.977,214.573 ; DC42.2@29.8,212.2 CC287.1@32.25,212.2 ; DC41.2@29.8,214.75 DC42.2@29.8,212.25 DC42.2@30.2,212.25 ; DC42.2@30.177,212.427 ccw(c30.724,212.974) 30.724,212.2 ; CC287.1@31.823,212.023 ccw(c31.396,211.596) 31.396,212.2 ccw(c31.396,212.804) CC287.1@31.823,212.377
  Bottom Layer w0.25: v1(10.25,150.25) 19.5,150.25 25.5,144.25 pad.ICT@37,144.25 40,141.25 42.8,141.25 DC25.2@43.75,142.2 DC25.2@43.8,142.25 ; v1@10.306,191.694 ccw(c9.836,192.164) 10.5,192.164 ccw(c11.164,192.164) v1@10.694,191.694 ; v1@10.444,150.056 cw(c10.914,149.586) 10.914,150.25 cw(c10.914,150.914) v1@10.444,150.444 ; v1(10.5,191.5) 10.5,203 v1(14.5,207) ; v1@10.556,167.194 ccw(c10.086,167.664) 10.75,167.664 ccw(c11.414,167.664) v1@10.944,167.194 ; v1@10.556,183.806 cw(c10.086,183.336) 10.75,183.336 cw(c11.414,183.336) v1@10.944,183.806 ; v1(10.75,167) v1(10.75,184) ; v1@14.225,207 cw(c13.561,207) 14.031,206.531 cw(c14.5,206.061) v1@14.5,206.725 ; pad.ICT@36.699,143.949 ccw(c35.974,143.224) 35.974,144.25 ccw(c35.974,145.276) pad.ICT@36.699,144.551 ; pad.ICT@37,143.825 cw(c37,142.799) 37.726,143.524 cw(c38.451,144.25) pad.ICT@37.425,144.25 ; 42.75,141.2 cw(c43.56,140.39) DC25.2@43.686,141.529 ; 42.839,141.289 ccw(c42.028,142.1) DC25.2@43.175,142.1 ; DC25.2@43.118,141.568 cw(c43.634,141.052) DC25.2@43.714,141.777
  Bottom Layer w0.5: DC25.2@43.8,142.25 45,142.25 RC271.2@48.4,142.25 ; DC25.2@44.068,141.882 cw(c44.957,140.993) 44.957,142.25 ; DC25.2@44.068,142.518 ccw(c44.716,143.166) 44.716,142.25 ; 45.043,142.25 cw(c45.043,140.993) DC26.2@45.932,141.882 ; 45.25,142.25 v1(45.25,143.825) ; 45.284,142.25 ccw(c45.284,143.166) DC26.2@45.932,142.518 ; DC26.2@46.568,141.882 cw(c47.457,140.993) 47.457,142.25 ; DC26.2@46.568,142.518 ccw(c47.216,143.166) 47.216,142.25 ; RC271.2@48.259,142.109 ccw(c47.917,141.767) 47.917,142.25 ccw(c47.917,142.733) RC271.2@48.259,142.391
XCLKOUT: RC93.4 UC20.138 | length 7.8
  Top Layer w0.25: v1(66,203.25) 66.5,203.75 UC20.138@66.5,205.8
  Bottom Layer w0.25: RC93.4@63.2,201.55 64.3,201.55 v1(66,203.25) ; RC93.4@63.288,201.462 cw(c63.502,201.248) 63.502,201.55 cw(c63.502,201.852) RC93.4@63.288,201.638 ; v1@65.725,203.25 cw(c65.061,203.25) 65.531,202.781 cw(c66,202.311) v1@66,202.975